# Altium PCB MotherBoardV2.PcbDoc
Units mil, origin at the board's own origin, x right, y up, seen from the top; angles counter-clockwise.
Board outline 6000 x 4000 mil, 2 copper layers (Top Layer, Bottom Layer); 54 components, 68 nets, 261 pads, 0 vias.
Unrouted connection lines stored in the file: 175.
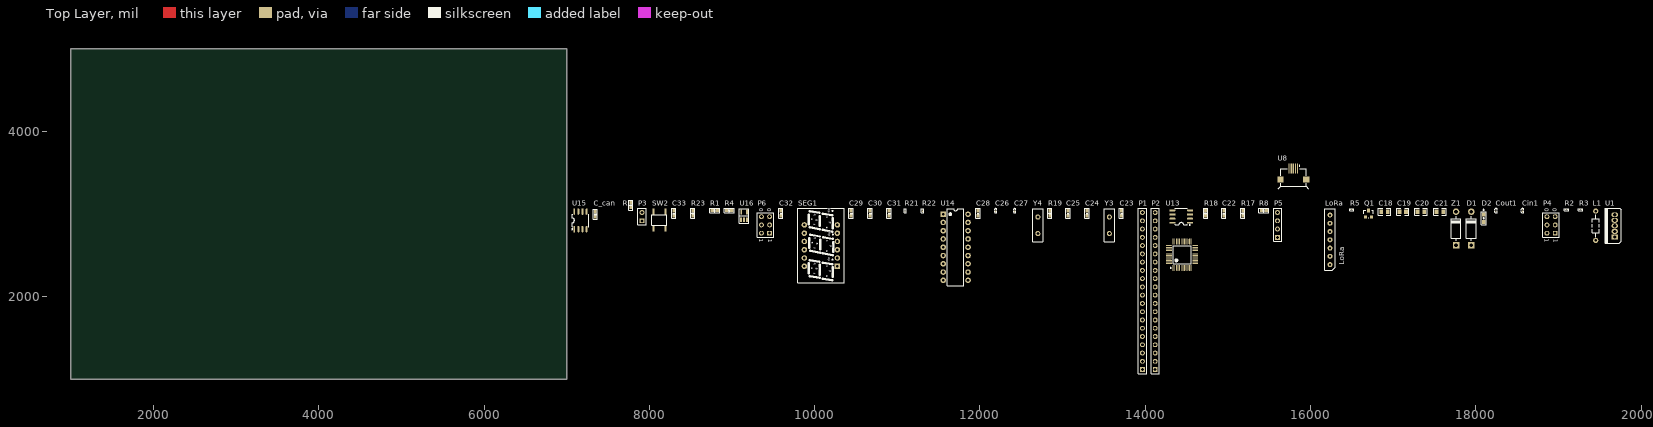
[diagram p0: Top Layer view]
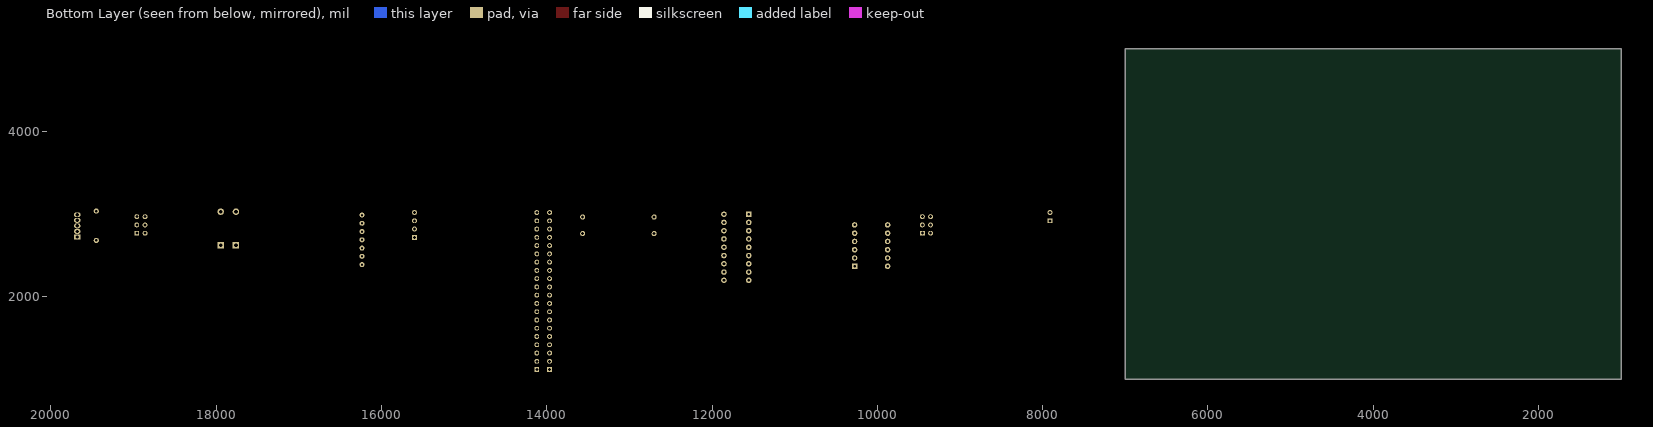
[diagram p1: Bottom Layer view, seen from below]

## Layer stack, top to bottom
Top Solder: solder mask 0.4, Solder Resist, Dk 3.5
Top Layer: signal copper 1.4
Dielectric 1: dielectric 12.6, FR-4, Dk 4.8
Bottom Layer: signal copper 1.4
Bottom Solder: solder mask 0.4, Solder Resist, Dk 3.5

## Board outline
1000,1000 7000,1000 7000,5000 1000,5000

## Design rules (kind name [scope] priority, off if disabled: settings)
Clearance [All] p1: gap=10 ignorepadtopadclearanceinfootprint=FALSE except(0: Arc-Hole Track-Hole SMDPad-Hole THPad-Hole Via-Hole Fill-Hole Poly-Hole Region-Hole Text-Hole)
PolygonConnect [All] p1: connectstyle=Relief reliefconductorwidth=10 reliefentries=4 polygonreliefangle="90 Angle" airgapwidth=10
RoomDefinition MotherBoard [InComponentClass('MotherBoard')] p1: confinementstyle=ConfineIn formatcopy=TRUE lockcomponents=FALSE outline 7045,1060 19770,1060 19770,3180 7045,3180
RoutingVias [All] p1: holewidth=28 width=50 viastyle="Through Hole" minholewidth=28 minwidth=50 maxholewidth=28 maxwidth=50
SolderMaskExpansion [All] p1: expansion=4 istentingtop=FALSE
Width [All] p1: maxlimit=10 minlimit=10 preferedwidth=10
30 further rules are at their usual default settings.

## Components (designator, comment, footprint, x,y, rotation, side; value= is the part's Value field where it differs from the comment)
C18 "104" 0805 16895,3030 r0 top
C19 "104" 0805 17115,3030 r0 top
C20 "104" 0805 17335,3030 r0 top
C21 "104" 0805 17565,3030 r0 top
C22 "104,0603" C0603 14950,3010 r90 top value=104
C23 "20p,0603" C0603 13710,3010 r90 top value=104
C24 "20p,0603" C0603 13295,3010 r90 top value=104
C25 "20p,0603" C0603 13065,3010 r90 top value=104
C26 "100pF" 0201C 12190,3030 r90 top
C27 "100pF" 0201C 12420,3030 r90 top
C28 "20p,0603" C0603 11975,3010 r90 top value=104
C29 "105,0603" C0603 10440,3010 r90 top value=104
C30 "106,0603" C0603 10670,3010 r90 top value=104
C31 "104,0603" C0603 10900,3010 r90 top value=104
C32 "223,0603" C0603 9590,3010 r90 top value=104
C33 "105,0603" C0603 8295,3010 r90 top value=104
C_can "105,0603" C0603 7345,3000 r90 top value=104
Cin1 "680μF/40V" 0201C 18565,3030 r90 top
Cout1 "" 0201C 18245,3030 r90 top
D1 "1N5824" DO-15 17945,2625 r90 top
D2 "LED" LED 18095,2950 r90 top
L1 "47μH" AL0204 19450,2860 r90 top
LoRa "LoRa_Output" LoRa_Output 15835,2240 r90 top
P1 "Header 20" HDR1X20 13965,1120 r90 top
P2 "Header 20" HDR1X20 14120,1120 r90 top
P3 "CAN Header" HDR1X2 7910,2920 r90 top
P4 "Header 3X2" HDR2X3 18960,2770 r90 top
P5 "SWD" HDR1X4 15600,2720 r90 top
P6 "Header 3X2" HDR2X3 9455,2770 r90 top
Q1 "2N3904" SOT-23 16700,3000 r0 top
R "120R,0603" R0603 7775,3110 r90 top
R1 "100K,0603" R0603 8790,3045 r0 top
R2 "10k" 0201R 19085,3055 r0 top
R3 "47k" 0201R 19255,3055 r0 top
R4 "100K,0603" R0603 8965,3045 r0 top
R5 "10k" 0201R 16485,3055 r0 top
R8 "20R,0603" R0603 15435,3045 r0 top
R17 "20R,0603" R0603 15180,3010 r90 top
R18 "4.7k,0603" R0603 14730,3010 r90 top
R19 "1M,0603" R0603 12845,3010 r90 top
R21 "10k" 0201R 11095,3030 r90 top
R22 "10k" 0201R 11305,3030 r90 top
R23 "10K,0603" R0603 8525,3010 r90 top
SEG1 "0.28IN-3-A" 0.36IN-3P 10275,2370 r90 top
SW2 "SW-PB_V" KEY-SMT 8120,2930 r90 top
U1 "LM2576-5.0" TO220-5A 19680,2725 r90 top
U8 "USB-mrico" Micro_USB 15791.26,3486.46 r0 top
U13 "STM32F103C8T6" 48P 14445,2510 r90 top
U14 "TM1636" DIP18 11705,2600 r0 top
U15 "TJA1050T/CM,118" SOIC-8_L5.0-W4.0-P1.27-LS6.0-BL 7165,2925 r0 top
U16 "RT9193" SOT-23-5 9145,2980 r0 top
Y3 "32.768K" XTAL1 13565,2765 r90 top
Y4 "8Mhz" XTAL1 12700,2765 r90 top
Z1 "24V" DO-15 17760,2625 r90 top

## Footprints (in the part's own frame and the unit in brackets; to place one, negate y for a bottom-side part, rotate by r counter-clockwise, add the part's x,y. Pads: shape width x height; smd on the part's side, far side on the other; paste and mask are expansions set on the pad)
0.36IN-3P [mm]
  rect 1.7x1.7 hole 0.8: 1(0,0)
  round 1.7 hole 0.8: 2(2.54,0) 3(5.08,0) 4(7.62,0) 5(10.16,0) 6(12.7,0) 7(12.7,10.16) 8(10.16,10.16) 9(7.62,10.16) 10(5.08,10.16) 11(2.54,10.16) 12(0,10.16)
  silkscreen extent -5.08,-2.03 17.78,12.19, body extent -4.9,-1.93 17.6,12.07, height 7.2
48P [mm]
  oval 1.8x0.3 smd: 1(-4.05,2.75) 2(-4.05,2.25) 3(-4.05,1.75) 4(-4.05,1.25) 5(-4.05,0.75) 6(-4.05,0.25) 7(-4.05,-0.25) 8(-4.05,-0.75) 9(-4.05,-1.25) 10(-4.05,-1.75) 11(-4.05,-2.25) 12(-4.05,-2.75) 25(4.05,-2.75) 26(4.05,-2.25) 27(4.05,-1.75) 28(4.05,-1.25) 29(4.05,-0.75) 30(4.05,-0.25) 31(4.05,0.25) 32(4.05,0.75) 33(4.05,1.25) 34(4.05,1.75) 35(4.05,2.25) 36(4.05,2.75)
  oval 0.568x1.95 smd mask+0.051: 1(9.802,-2.454) 2(11.072,-2.454) 3(12.342,-2.454) 4(13.612,-2.454) 5(13.612,2.956) 6(12.342,2.956) 7(11.072,2.956) 8(9.802,2.956)
  oval 0.3x1.8 smd: 13(-2.75,-4.05) 14(-2.25,-4.05) 15(-1.75,-4.05) 16(-1.25,-4.05) 17(-0.75,-4.05) 18(-0.25,-4.05) 19(0.25,-4.05) 20(0.75,-4.05) 21(1.25,-4.05) 22(1.75,-4.05) 23(2.25,-4.05) 24(2.75,-4.05) 37(2.75,4.05) 38(2.25,4.05) 39(1.75,4.05) 40(1.25,4.05) 41(0.75,4.05) 42(0.25,4.05) 43(-0.25,4.05) 44(-0.75,4.05) 45(-1.25,4.05) 46(-1.75,4.05) 47(-2.25,4.05) 48(-2.75,4.05)
  silkscreen extent -4.17,-2.75 14.21,3.57, body extent -3.5,-3.5 3.5,3.5, height 1.6
0201C [mm]
  rect 0.3x0.3 smd: 1(0,0) 2(0.6,0)
  silkscreen extent -0.39,-0.35 0.99,0.35, body extent 0,-0.15 0.61,0.15, height 0.31
0201R [mm]
  rect 0.3x0.3 smd: 1(0,0) 2(0.6,0)
  silkscreen extent -0.35,-0.35 0.95,0.35, body extent -0.09,-0.16 0.59,0.17, height 0.34
0805 [mm]
  rect 1.16x1.45 smd: 1(-1.016,0) 2(1.016,0)
  silkscreen extent -1.9,-1.03 1.87,1.04
AL0204 [mm] "9*2*4mm（脚距，直径，长度）"
  round 1.6 hole 0.8: 1(-4.5,0) 2(4.5,0)
  silkscreen extent -3.56,-1.02 3.43,1.02, body extent -4.75,-1.02 4.75,1.02, height 2.07
C0603 [mil]
  rect 40x35 smd: 1(-29.92,0) 2(29.92,0)
  silkscreen extent -60,-26 60,26
DIP18 [mm]
  rect 1.7x1.7 hole 0.8: 1(-3.81,10.16)
  round 1.7 hole 0.8: 2(-3.81,7.62) 3(-3.81,5.08) 4(-3.81,2.54) 5(-3.81,0) 6(-3.81,-2.54) 7(-3.81,-5.08) 8(-3.81,-7.62) 9(-3.81,-10.16) 10(3.81,-10.16) 11(3.81,-7.62) 12(3.81,-5.08) 13(3.81,-2.54) 14(3.81,0) 15(3.81,2.54) 16(3.81,5.08) 17(3.81,7.62) 18(3.81,10.16)
  silkscreen extent -2.54,-11.85 2.54,11.85, body extent -4,-11.54 4,11.56, height 4.35
DO-15 [mm]
  rect 2x2 hole 1.1: A(0,0)
  round 2 hole 1.1: K(10.3,0)
  silkscreen extent 1.34,-1.52 8.96,1.52, body extent -0.34,-1.65 10.76,1.65, height 3.35
HDR1X2 [mm] "Connector; Header; 2 Position"
  rect 1.5x1.5 hole 0.9: 1(0,0)
  round 1.5 hole 0.9: 2(2.54,0)
  silkscreen extent -1.27,-1.27 3.81,1.27
HDR1X4 [mm] "Connector; Header; 4 Position; Right Angle"
  rect 1.5x1.5 hole 0.9: 1(0,0)
  round 1.5 hole 0.9: 2(2.54,0) 3(5.08,0) 4(7.62,0)
  silkscreen extent -1.27,-1.27 8.89,1.14
HDR1X20 [mm] "Connector; Header; 20 Position"
  rect 1.5x1.5 hole 0.9: 1(0,0)
  round 1.5 hole 0.9: 2(2.54,0) 3(5.08,0) 4(7.62,0) 5(10.16,0) 6(12.7,0) 7(15.24,0) 8(17.78,0) 9(20.32,0) 10(22.86,0) 11(25.4,0) 12(27.94,0) 13(30.48,0) 14(33.02,0) 15(35.56,0) 16(38.1,0) 17(40.64,0) 18(43.18,0) 19(45.72,0) 20(48.26,0)
  silkscreen extent -1.27,-1.27 49.53,1.27
HDR2X3 [mm] "Connector; Header; 3x2 Position"
  rect 1.5x1.5 hole 0.9: 1(0,0)
  round 1.5 hole 0.9: 2(0,2.54) 3(2.54,0) 4(2.54,2.54) 5(5.08,0) 6(5.08,2.54)
  silkscreen extent -1.27,-1.27 6.35,3.81
KEY-SMT [mm]
  rect 2x0.6 smd: 1(-2.55,-1.85) 1(2.55,-1.87) 2(-2.55,1.85) 2(2.55,1.85)
  silkscreen extent -1.65,-2.29 1.65,2.29
LED [mil]
  rect 49x43 smd: 1(46.26,0) 2(-46.26,0)
  silkscreen extent -81,-31 118,31
LoRa_Output [mil]
  round 60 hole 30: 1(150,-400) 2(250,-400) 3(350,-400) 4(450,-400) 5(550,-400) 6(650,-400) 7(750,-400)
  silkscreen extent 80,-465 825,-335
Micro_USB [mm]
  rect 0.4x3 smd: 1(1.3,1.679) 2(0.65,1.679) 3(0,1.679) 4(-0.65,1.679) 5(-1.3,1.679)
  round 0 hole 0.8 unplated: MH1(2,0.471) MH2(-2,0.471)
  rect 1.9x1.9 smd: ""(-3.95,-1.679) ""(3.95,-1.679)
  silkscreen extent -4.57,-4.46 4.57,2.64
R0603 [mil]
  rect 40x35 smd: 1(-29.92,0) 2(29.92,0)
  silkscreen extent -60,-26 60,26
SOIC-8_L5.0-W4.0-P1.27-LS6.0-BL [mil]
  oval 22.38x76.78 smd mask+2: 1(-75,-106.5) 2(-25,-106.5) 3(25,-106.5) 4(75,-106.5) 5(75,106.5) 6(25,106.5) 7(-25,106.5) 8(-75,106.5)
  silkscreen extent -106,-111 98,75
SOT-23 [mil]
  rect 36x36 smd: B(-35,-35) E(40,-35)
  rect 36x50 smd: C(3,45)
  silkscreen extent -55,-40 60,50, body extent -54,-48 60,62, height 47
SOT-23-5 [mm]
  rect 0.6x1.5 smd: 1(-0.9,-1.2) 2(0,-1.2)
  rect 0.63x1.5 smd: 3(0.9,-1.2)
  rect 0.5x1.5 smd: 4(0.9,1.2) 5(-0.9,1.2)
  silkscreen extent -1.47,-2.21 1.43,2.18
TO220-5A [mm]
  rect 1.5x2 hole 1: 1(0,0)
  oval 1.5x2 hole 1: 2(1.7,0) 3(3.4,0) 4(5.1,0) 5(6.8,0)
  silkscreen extent -1.88,-1.96 8.74,2.95, body extent -1.59,-1.74 8.51,2.76, height 17.5
XTAL1 [mil]
  round 62 hole 35.43: 1(0,0) 2(200,0)
  silkscreen extent -100,-60 300,60

## Part data
C18 C19 C20 C21: library part 105, BOM_Manufacturer=FH, BOM_Manufacturer Part=0805B103K101NT, BOM_Supplier=LCSC, BOM_Supplier Part=C128805, Contributor=LCSC, nameAlias=Capacitance, spicePre=C, spiceSymbolName=0805B103K101NT
C22 C23 C24 C25 C28 C29 C30 C31 C32 C33 C_can: library part Cap, "Capacitor", LatestRevisionDate=17-Jul-2002, LatestRevisionNote="Re-released for DXP Platform.", Published=8-Jun-2000, Publisher="Altium Limited"
C26 C27 Cin1 Cout1: library part CAP, "无极性电容"
D1: library part "DIODE ZENER", "稳压二极管"
L1: library part INDUCTOR, "INDUCTOR"
P1 P2: "Header, 20-Pin", LatestRevisionDate=17-Jul-2002, LatestRevisionNote="Re-released for DXP Platform.", Publisher="Altium Limited"
P3: library part "Header 2", "Header, 2-Pin", LatestRevisionDate=17-Jul-2002, LatestRevisionNote="Re-released for DXP Platform.", Publisher="Altium Limited"
P4 P6: "Header, 3-Pin, Dual row", LatestRevisionDate=17-Jul-2002, LatestRevisionNote="Re-released for DXP Platform.", Publisher="Altium Limited"
P5: library part "Header 4", "Header, 4-Pin", LatestRevisionDate=17-Jul-2002, LatestRevisionNote="Re-released for DXP Platform.", Publisher="Altium Limited"
Q1: library part NPN, "NPN三极管"
R R1 R4 R8 R17 R18 R19 R23: library part Res2, "Resistor", LatestRevisionDate=17-Jul-2002, LatestRevisionNote="Re-released for DXP Platform.", Published=8-Jun-2000, Publisher="Altium Limited"
R2 R3 R5 R21 R22: library part RES
SEG1: "3位0.28寸共阳数码管"
SW2: "SWITCH"
U1: "DC降压芯片"
U8: library part usb-STM
U14: "TM1636LED控制芯片"
U15: JLCPCB Part Class="Basic Part", Manufacturer=NXP(恩智浦), Supply Voltage="4.75V ~ 5.25V", Add into BOM=yes, Convert to PCB=yes, Datasheet=https://atta.szlcsc.com/upload/public/pdf/source/20140411/1457707042917.pdf, Device=TJA1050T/CM,118, LCSC Part Name=TJA1050T/CM,118, Manufacturer Part=TJA1050T/CM,118, Name=TJA1050T/CM,118, Protocol=CAN总线, Supplier=LCSC, Supplier Footprint=SOIC-8_150mil, Supplier Part=C6952, Symbol=TJA1050T/CM,118, Type=收发器
U16: library part RT9193X_5P, ICA_MFR_NAME=RICHTEK, ICA_PARTNUM=$$2191094$$RT9193-15CU5, Part Number=TMP-13
Y3 Y4: library part XTAL, "Crystal Oscillator", LatestRevisionDate=17-Jul-2002, LatestRevisionNote="Re-released for DXP Platform.", Published=8-Jun-2000, Publisher="Altium Limited"
Z1: library part "DIODE SCHOTTKY", "肖特基二极管"

## Nets (pads, with @x,y where several pads share a name; then routed paths per layer and width w, separated by ;. In a path a pad name is that pad's centre, name@x,y a point inside that pad or via, vN(x,y) a via of type N, cw(c..) or ccw(c..) an arc to the next point about the centre after c; other vN are vias at no path point)
3.3V: C18.2 C19.2 C20.2 C21.2 C22.2 C30.1 C31.1 D2.1 P1.1 P2.18 P5.4 P6.1 P6.2 R23.2 U13.9 U13.24 U13.36 U13.48 U16.5
5V: C29.1 C_can.1 Cout1.1 L1.2 LoRa.6 P1.3 P4.1 P4.2 R18.1 R21.1 R22.1 U1.4 U14.14 U15.3 U16.1 U16.3
A0: P2.5 U13.10
A1: P2.6 U13.11
A2: P2.7 U13.12
A3: P2.8 U13.13
A4: P2.9 U13.14
A5: P2.10 U13.15
A6: P2.11 U13.16
A7: P2.12 U13.17
A8: P1.16 U13.29
A9: P1.15 U13.30
A10: P1.14 U13.31
A11: P1.13 R8.2 U13.32
A12: P1.12 R17.2 R18.2 U13.33
A15: P1.11 U13.38
B0: P2.13 U13.18
B1: P2.14 U13.19
B3: P1.10 U13.39
B4: C27.1 P1.9 R22.2 U13.40 U14.16
B5: C26.1 P1.8 R21.2 U13.41 U14.15
B6: LoRa.3 P1.7 U13.42
B7: LoRa.4 P1.6 U13.43
B8: P1.5 U13.45 U15.4
B9: P1.4 U13.46 U15.1
B10: P2.15 U13.21
B11: P2.16 U13.22
B12: P1.20 U13.25
B13: P1.19 U13.26
B14: P1.18 U13.27
B15: P1.17 U13.28
BOOT0: R4.1 U13.44
BOOT1: R1.1 U13.20
C13: P2.2 U13.2
C14: C23.2 P2.3 U13.3
C15: C24.2 P2.4 U13.4 Y3.1
CANH: P3.1 R.2 U15.7
CANL: P3.2 R.1 U15.6
GND: C18.1 C19.1 C20.1 C21.1 C22.1 C23.1 C24.1 C25.1 C26.2 C27.2 C28.1 C29.2 C30.2 C31.2 C32.2 C33.1 C_can.2 Cin1.1 Cout1.2 D1.A D2.2 LoRa.7 P1.2 P2.19 P2.20 P4.5 P4.6 P5.1 P6.5 P6.6 Q1.E R5.1 SW2.1 U1.3 U13.8 U13.23 U13.35 U13.47 U14.1 U15.2 U15.8 U16.2
GRID1: SEG1.8 U14.13
GRID2: SEG1.9 U14.12
GRID3: SEG1.12 U14.11
MD0: LoRa.1 P4.4
MD1: LoRa.2 P4.3
NetC32_1: C32.1 U16.4
NetD1_K: D1.K L1.1
NetP6_3: P6.3 R1.2
NetP6_4: P6.4 R4.2
NetQ1_B: Q1.B R5.2 Z1.A
NetQ1_C: Q1.C R3.1 U1.5
NetR2_1: R2.1 Z1.K
NetR8_1: R8.1
NetR17_1: R17.1
OSCIN: C25.2 R19.2 U13.5
OSCOUT: C28.2 R19.1 U13.6 Y4.1
RESET: C33.2 P2.17 R23.1 SW2.2 U13.7
SEG1: SEG1.11 U14.2
SEG2: SEG1.7 U14.3
SEG3: SEG1.4 U14.4
SEG4: SEG1.2 U14.5
SEG5: SEG1.1 U14.6
SEG6: SEG1.10 U14.7
SEG7: SEG1.5 U14.8
SEG8: SEG1.3 U14.9
SWCLK: P5.2 U13.37
SWIO: P5.3 U13.34
VB: P2.1 U13.1
Vin=24V: Cin1.2 R2.2 R3.2 U1.1
pads on no net: LoRa.5 SEG1.6 U1.2 U8. U8.1 U8.2 U8.3 U8.4 U8.5 U8.MH1 U8.MH2 U14.10 U14.17 U14.18 U15.5 Y3.2 Y4.2

## Text inside footprints (layer, text, board x,y; h text height)
P4: Top Overlay "1" at 18940.87,2698.85 h50 r270; Top Overlay "1" at 18835,2700 h50 r270; Top Overlay "0" at 18980,3030 h50 r90; Top Overlay "0" at 18880,3030 h50 r90
P6: Top Overlay "1" at 9435.87,2698.85 h50 r270; Top Overlay "1" at 9330,2700 h50 r270; Top Overlay "0" at 9475,3030 h50 r90; Top Overlay "0" at 9375,3030 h50 r90
SEG1: Top Overlay "f" at 10015,2275 h27.56 r90; Top Overlay "b" at 10015,2390 h27.56 r90; Top Overlay "g" at 10030,2325 h27.56 r90; Top Overlay "a" at 9975,2335 h27.56 r90; Top Overlay "d" at 10200,2295 h27.56 r90; Top Overlay "e" at 10155,2235 h27.56 r90; Top Overlay "dp" at 10185,2430 h27.56 r90; Top Overlay "c" at 10155,2360 h27.56 r90; Top Overlay "f" at 10020,2580 h27.56 r90; Top Overlay "b" at 10020,2695 h27.56 r90; Top Overlay "g" at 10035,2630 h27.56 r90; Top Overlay "a" at 9980,2640 h27.56 r90; Top Overlay "d" at 10205,2600 h27.56 r90; Top Overlay "e" at 10160,2540 h27.56 r90; Top Overlay "dp" at 10190,2735 h27.56 r90; Top Overlay "c" at 10160,2665 h27.56 r90; Top Overlay "f" at 10015,2865 h27.56 r90; Top Overlay "b" at 10015,2980 h27.56 r90; Top Overlay "g" at 10030,2915 h27.56 r90; Top Overlay "a" at 9975,2925 h27.56 r90; Top Overlay "d" at 10200,2885 h27.56 r90; Top Overlay "e" at 10155,2825 h27.56 r90; Top Overlay "dp" at 10185,3020 h27.56 r90; Top Overlay "c" at 10155,2950 h27.56 r90